# Altium PCB pcb.PcbDoc
Units mil, origin at the board's own origin, x right, y up, seen from the top; angles counter-clockwise.
Board outline 10079.12 x 10365.92 mil, 2 copper layers (Top Layer, Bottom Layer), stack 62.205 mil thick; 131 components, 60 nets, 394 pads, 54 vias.
Unrouted connection lines stored in the file: 29.
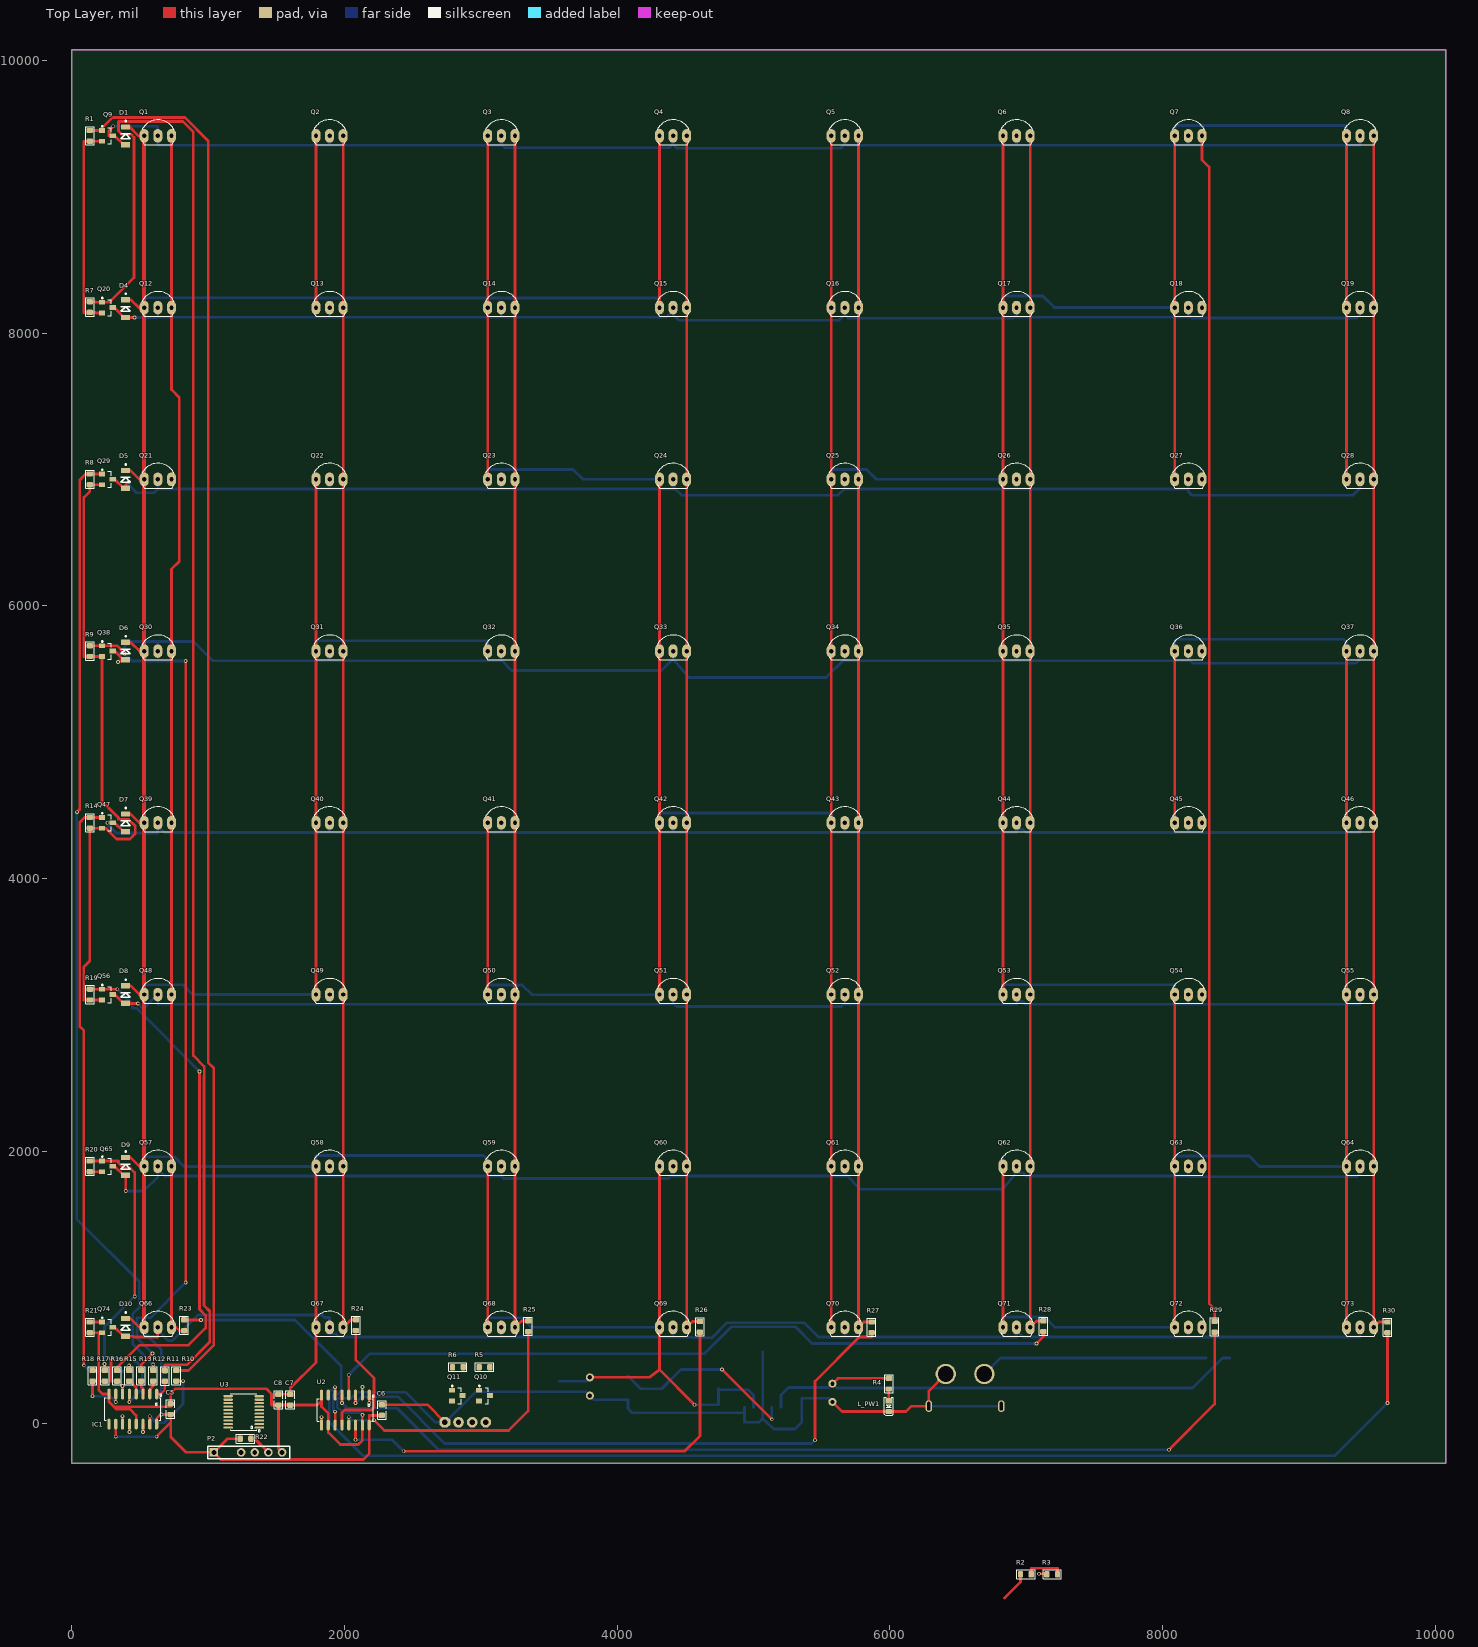
[diagram p0: Top Layer view]
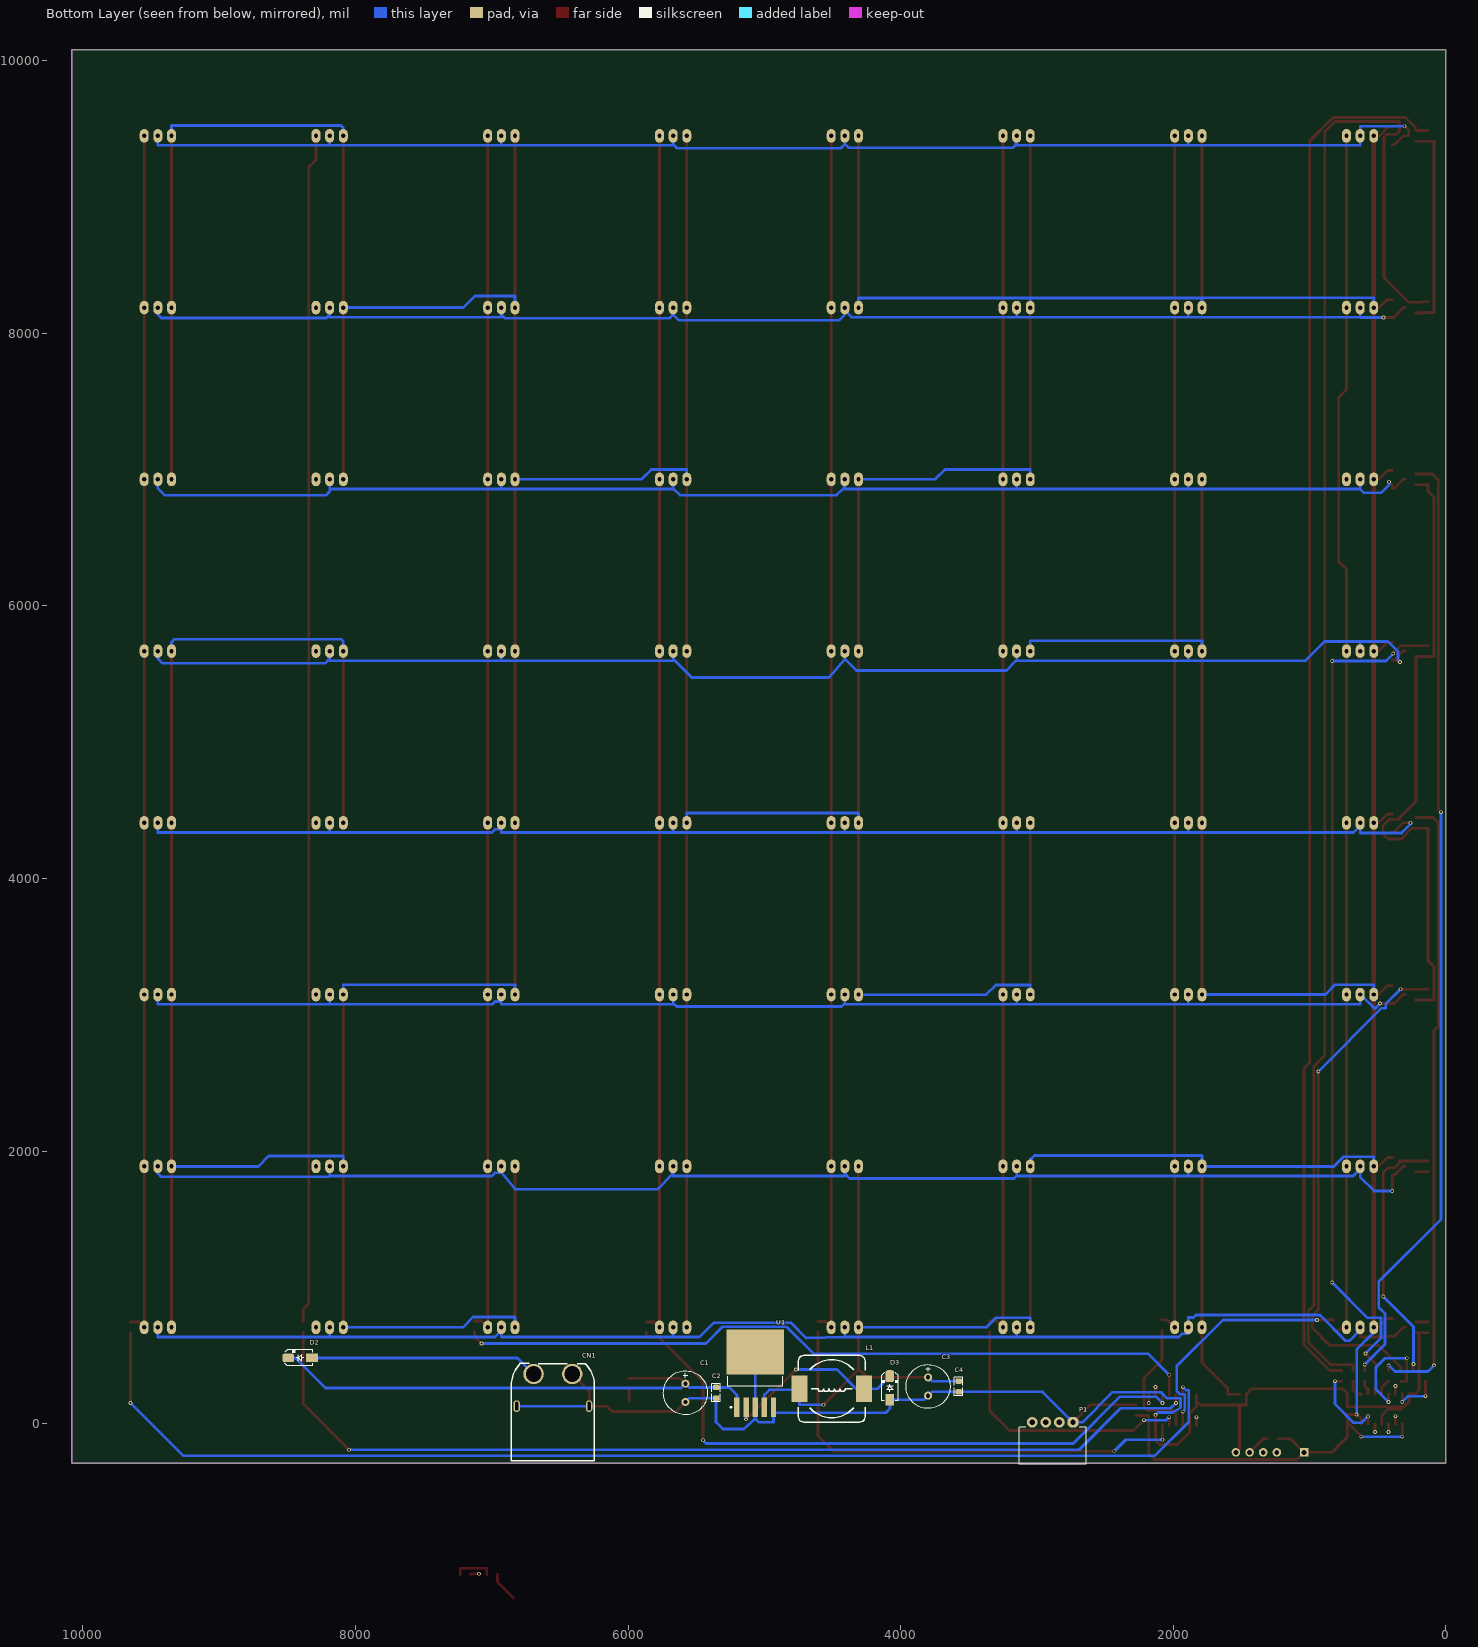
[diagram p1: Bottom Layer view, seen from below]

## Layer stack, top to bottom
Top Solder: solder mask 0.3937, Solder Resist, Dk 3.5
Top Layer: signal copper 1.378
Dielectric 1: dielectric 59.4488, FR-4, Dk 4.8
Bottom Layer: signal copper 1.378
Bottom Solder: solder mask 0.3937, Solder Resist, Dk 3.5

## Board outline
0,-287.18 0,10078.74 10079.11,10078.74 10079.12,-287.18

## Design rules (kind name [scope] priority, off if disabled: settings)
AssemblyTestPointUsage [All] p0: scope1count=1 scope1_0_kind=Board scope1_0_value=Board scope2count=1 scope2_0_kind=Board scope2_0_value=Board commentlength=0
AssemblyTestpoint [All] p0: scope1count=1 scope1_0_kind=Board scope1_0_value=Board scope2count=1 scope2_0_kind=Board scope2_0_value=Board commentlength=0
Clearance [All] p0: scope1count=1 scope1_0_kind=Board scope1_0_value=Board scope2count=1 scope2_0_kind=Board scope2_0_value=Board commentlength=0 gap=10
Clearance [All] p1: gap=10 ignorepadtopadclearanceinfootprint=TRUE except(30: THPad-Poly)
ComponentClearance [All] p0: scope1count=1 scope1_0_kind=Board scope1_0_value=Board scope2count=1 scope2_0_kind=Board scope2_0_value=Board commentlength=0 gap=10 collisioncheckmode=3
DiffPairsRouting [All] p0: scope1count=1 scope1_0_kind=Board scope1_0_value=Board scope2count=1 scope2_0_kind=Board scope2_0_value=Board commentlength=0
FabricationTestPointUsage [All] p0: scope1count=1 scope1_0_kind=Board scope1_0_value=Board scope2count=1 scope2_0_kind=Board scope2_0_value=Board commentlength=0 valid=0 allowmultiple=FALSE
FabricationTestpoint [All] p0: scope1count=1 scope1_0_kind=Board scope1_0_value=Board scope2count=1 scope2_0_kind=Board scope2_0_value=Board commentlength=0 side=3 testpointundercomponent=TRUE minsize=40 maxsize=100 preferedsize=60 minholesize=0 maxholesize=40 preferedholesize=32 testpointgrid=1
FanoutControl Fanout_BGA [All] p0 off: scope1count=1 scope1_0_kind=Board scope1_0_value=Board scope2count=1 scope2_0_kind=Board scope2_0_value=Board commentlength=69 // Protel DXP Scope 1 Expression Was: IsBGA   Fanout_BGA (Default Rule)
FanoutControl Fanout_LCC [All] p0 off: scope1count=1 scope1_0_kind=Board scope1_0_value=Board scope2count=1 scope2_0_kind=Board scope2_0_value=Board commentlength=69 // Protel DXP Scope 1 Expression Was: IsLCC   Fanout_LCC (Default Rule)
FanoutControl Fanout_SOIC [All] p0 off: scope1count=1 scope1_0_kind=Board scope1_0_value=Board scope2count=1 scope2_0_kind=Board scope2_0_value=Board commentlength=71 // Protel DXP Scope 1 Expression Was: IsSOIC   Fanout_SOIC (Default Rule)
FanoutControl Fanout_Small [All] p0 off: scope1count=1 scope1_0_kind=Board scope1_0_value=Board scope2count=1 scope2_0_kind=Board scope2_0_value=Board commentlength=84 // Protel DXP Scope 1 Expression Was: (CompPinCount < 5)   Fanout_Small (Default Rule)
FanoutControl Fanout_Default [All] p0: scope1count=1 scope1_0_kind=Board scope1_0_value=Board scope2count=1 scope2_0_kind=Board scope2_0_value=Board commentlength=30 // Fanout_Default (Default Rule)
Height [All] p0: scope1count=1 scope1_0_kind=Board scope1_0_value=Board scope2count=1 scope2_0_kind=Board scope2_0_value=Board commentlength=0
Height [All] p1: minheight=0 maxheight=1574.8 prefheight=500
HoleSize [All] p0: scope1count=1 scope1_0_kind=Board scope1_0_value=Board scope2count=1 scope2_0_kind=Board scope2_0_value=Board commentlength=0 absolutevalues=TRUE maxlimit=236.22 minlimit=3.94 maxpercent=80.000 minpercent=20.000
HoleSize [All] p1: absolutevalues=TRUE maxlimit=236.22 minlimit=3.94 maxpercent=80.000 minpercent=20.000
HoleToHoleClearance [All] p0: scope1count=1 scope1_0_kind=Board scope1_0_value=Board scope2count=1 scope2_0_kind=Board scope2_0_value=Board commentlength=0
LayerPairs [All] p0: scope1count=1 scope1_0_kind=Board scope1_0_value=Board scope2count=1 scope2_0_kind=Board scope2_0_value=Board commentlength=0 enforce=TRUE
MinimumSolderMaskSliver [All] p0: scope1count=1 scope1_0_kind=Board scope1_0_value=Board scope2count=1 scope2_0_kind=Board scope2_0_value=Board commentlength=0
MinimumSolderMaskSliver [All] p1: minsoldermaskwidth=1
NetAntennae [All] p0: scope1count=1 scope1_0_kind=Board scope1_0_value=Board scope2count=1 scope2_0_kind=Board scope2_0_value=Board commentlength=0
PasteMaskExpansion [All] p0: scope1count=1 scope1_0_kind=Board scope1_0_value=Board scope2count=1 scope2_0_kind=Board scope2_0_value=Board commentlength=0 expansion=0
PlaneClearance [All] p0: scope1count=1 scope1_0_kind=Board scope1_0_value=Board scope2count=1 scope2_0_kind=Board scope2_0_value=Board commentlength=0 clearance=20
PlaneConnect [All] p0: scope1count=1 scope1_0_kind=Board scope1_0_value=Board scope2count=1 scope2_0_kind=Board scope2_0_value=Board commentlength=0 planeconnectstyle=Relief reliefexpansion=20 reliefentries=4 reliefconductorwidth=35 reliefairgap=10
PlaneConnect [All] p1: planeconnectstyle=Relief reliefexpansion=20 reliefentries=4 reliefconductorwidth=35 reliefairgap=10
PolygonConnect [All] p0: scope1count=1 scope1_0_kind=Board scope1_0_value=Board scope2count=1 scope2_0_kind=Board scope2_0_value=Board commentlength=0 connectstyle=Relief reliefconductorwidth=25 reliefentries=4 polygonreliefangle="90 Angle"
PolygonConnect [All] p1: thpad.connectstyle=Relief thpad.reliefconductorwidth=25 thpad.reliefentries=4 thpad.polygonreliefangle="90 Angle" thpad.airgapwidth=30 smdpad.connectstyle=Relief smdpad.reliefconductorwidth=25 smdpad.reliefentries=4 smdpad.polygonreliefangle="90 Angle" smdpad.airgapwidth=15 via.connectstyle=Relief via.reliefconductorwidth=25 via.reliefentries=4 via.polygonreliefangle="90 Angle" via.airgapwidth=15
RoutingCorners [All] p0: scope1count=1 scope1_0_kind=Board scope1_0_value=Board scope2count=1 scope2_0_kind=Board scope2_0_value=Board commentlength=0 cornerstyle=45-Degree minsetback=100 maxsetback=100
RoutingLayers [All] p0: scope1count=1 scope1_0_kind=Board scope1_0_value=Board scope2count=1 scope2_0_kind=Board scope2_0_value=Board commentlength=0 top layer=Automatic bottom layer=Automatic
RoutingPriority [All] p0: scope1count=1 scope1_0_kind=Board scope1_0_value=Board scope2count=1 scope2_0_kind=Board scope2_0_value=Board commentlength=0
RoutingTopology [All] p0: scope1count=1 scope1_0_kind=Board scope1_0_value=Board scope2count=1 scope2_0_kind=Board scope2_0_value=Board commentlength=0 topology=Shortest
RoutingVias [All] p0: scope1count=1 scope1_0_kind=Board scope1_0_value=Board scope2count=1 scope2_0_kind=Board scope2_0_value=Board commentlength=0 holewidth=15.75 width=27.56 viastyle="Through Hole" minholewidth=11.81 minwidth=23.62 maxholewidth=39.37 maxwidth=98.43
RoutingVias [All] p1: holewidth=15.75 width=27.56 viastyle="Through Hole" minholewidth=11.81 minwidth=23.62 maxholewidth=39.37 maxwidth=98.43
ShortCircuit [All] p0: scope1count=1 scope1_0_kind=Board scope1_0_value=Board scope2count=1 scope2_0_kind=Board scope2_0_value=Board commentlength=0 allowed=FALSE
SilkToBoardRegionClearance [All] p0: scope1count=1 scope1_0_kind=Board scope1_0_value=Board scope2count=1 scope2_0_kind=Board scope2_0_value=Board commentlength=0
SilkToSilkClearance [All] p0: scope1count=1 scope1_0_kind=Board scope1_0_value=Board scope2count=1 scope2_0_kind=Board scope2_0_value=Board commentlength=0
SilkToSilkClearance [All] p1: silktosilkclearance=1
SilkToSolderMaskClearance [All] p0 off: scope1count=1 scope1_0_kind=Board scope1_0_value=Board scope2count=1 scope2_0_kind=Board scope2_0_value=Board commentlength=44 // Protel DXP Scope 1 Expression Was: IsPad
SilkToSolderMaskClearance [IsPad] p1: minsilkscreentomaskgap=0 clearancetoexposedcopper=TRUE
SolderMaskExpansion [All] p0: scope1count=1 scope1_0_kind=Board scope1_0_value=Board scope2count=1 scope2_0_kind=Board scope2_0_value=Board commentlength=0 expansion=4
SolderMaskExpansion [All] p1: expansion=4 istentingtop=FALSE
SupplyNets "Schematic Supply Nets_4" [All] p0: scope1count=1 scope1_0_kind=Net scope1_0_value=+5 scope2count=1 scope2_0_kind=Board scope2_0_value=Board commentlength=0 voltage=0.000
SupplyNets "Schematic Supply Nets_3" [All] p0: scope1count=1 scope1_0_kind=Net scope1_0_value=GND scope2count=1 scope2_0_kind=Board scope2_0_value=Board commentlength=0 voltage=0.000
SupplyNets "Schematic Supply Nets_2" [All] p0: scope1count=1 scope1_0_kind=Net scope1_0_value=+24 scope2count=1 scope2_0_kind=Board scope2_0_value=Board commentlength=0 voltage=0.000
SupplyNets "Schematic Supply Nets_1" [All] p0: scope1count=1 scope1_0_kind=Net scope1_0_value=+3V3 scope2count=1 scope2_0_kind=Board scope2_0_value=Board commentlength=0 voltage=0.000
SupplyNets "Schematic Supply Nets" [All] p0: scope1count=1 scope1_0_kind=Net scope1_0_value=+24IN scope2count=1 scope2_0_kind=Board scope2_0_value=Board commentlength=0 voltage=0.000
SupplyNets "Schematic Supply Nets_4" [InNet('+5')] p1: voltage=0.000
SupplyNets "Schematic Supply Nets_3" [InNet('GND')] p2: voltage=0.000
SupplyNets "Schematic Supply Nets_2" [InNet('+24')] p3: voltage=0.000
SupplyNets "Schematic Supply Nets_1" [InNet('+3V3')] p4: voltage=0.000
SupplyNets "Schematic Supply Nets" [InNet('+24IN')] p5: voltage=0.000
UnRoutedNet [All] p0: scope1count=1 scope1_0_kind=Board scope1_0_value=Board scope2count=1 scope2_0_kind=Board scope2_0_value=Board commentlength=0
UnRoutedNet [All] p1: checkbadconnections=TRUE
UnpouredPolygon [All] p0: scope1count=1 scope1_0_kind=Board scope1_0_value=Board scope2count=1 scope2_0_kind=Board scope2_0_value=Board commentlength=0
Width [All] p0: scope1count=1 scope1_0_kind=Board scope1_0_value=Board scope2count=1 scope2_0_kind=Board scope2_0_value=Board commentlength=0 maxlimit=100 minlimit=10 preferedwidth=20
Width [All] p1: maxlimit=100 minlimit=10 preferedwidth=20
23 further rules are at their usual default settings.

## Components (designator, comment, footprint, x,y, rotation, side; value= is the part's Value field where it differs from the comment)
C1 "470uF/35V" C8X12mm 5578.82,228.56 r270 bottom
C2 "104" C_0805_SMD 5354.33,228.57 r90 bottom
C3 "220uF/35V" C8X12mm 3799.21,274.76 r270 bottom
C4 "104" C_0805_SMD 3574.8,274.76 r90 bottom
C5 "104" C_0805_SMD 723.75,109.07 r270 top
C6 "104" C_0805_SMD 2273.09,101.88 r270 top
C7 "10uF/25V" C_0805_SMD 1601.18,177.63 r270 top
C8 "104" C_0805_SMD 1514.57,177.63 r270 top
CN1 "XT60PW-M" CONN-TH_XT60PW-M 6551.18,86.83 r90 bottom
D1 "LL4148" SOD80C_MFG 394.13,9448.82 r270 top
D2 "SS34" D_SMA#1 8405.51,484.25 r0 bottom
D3 "SS34" D_SMA#2 4078.74,264 r90 bottom
D4 "LL4148" SOD80C_MFG 394.13,8181.1 r270 top
D5 "LL4148" SOD80C_MFG 394.13,6929.13 r270 top
D6 "LL4148" SOD80C_MFG 394.13,5669.29 r270 top
D7 "LL4148" SOD80C_MFG 394.13,4409.45 r270 top
D8 "LL4148" SOD80C_MFG 394.13,3149.61 r270 top
D9 "LL4148" SOD80C_MFG 394.13,1889.76 r270 top
D10 "LL4148" SOD80C_MFG 394.13,708.66 r270 top
IC1 "74HC595" SO_16 446.3,109.07 r270 top
L1 "68uH" CDRH127 4505.8,258.09 r0 bottom
L_PW1 "LED RED" "LED 0805 Red" 5991.81,130.14 r270 top
P1 "XH2.54 4P" XH2.54_4P_RA 2885.83,12.03 r0 bottom
P2 "Nuvoton" "Header Code Nuvoton 2.54 6P" 1290.89,-208.66 r0 top
Q1 "A3144" QTO-92 629.92,9448.82 r0 top locked
Q2 "A3144" QTO-92 1889.76,9448.82 r0 top locked
Q3 "A3144" QTO-92 3149.61,9448.82 r0 top locked
Q4 "A3144" QTO-92 4409.45,9448.82 r0 top locked
Q5 "A3144" QTO-92 5669.29,9448.82 r0 top locked
Q6 "A3144" QTO-92 6929.13,9448.82 r0 top locked
Q7 "A3144" QTO-92 8188.98,9448.82 r0 top locked
Q8 "A3144" QTO-92 9448.82,9448.82 r0 top locked
Q9 "S8050" "SOT23_N NXP" 260.28,9448.82 r0 top
Q10 "BSS138L" "SOT23_N NXP" 3026.27,207.83 r0 top
Q11 "BSS138L" "SOT23_N NXP" 2826.77,207.83 r0 top
Q12 "A3144" QTO-92 629.92,8188.98 r0 top locked
Q13 "A3144" QTO-92 1889.76,8188.98 r0 top locked
Q14 "A3144" QTO-92 3149.61,8188.98 r0 top locked
Q15 "A3144" QTO-92 4409.45,8188.98 r0 top locked
Q16 "A3144" QTO-92 5669.29,8188.98 r0 top locked
Q17 "A3144" QTO-92 6929.13,8188.98 r0 top locked
Q18 "A3144" QTO-92 8188.98,8188.98 r0 top locked
Q19 "A3144" QTO-92 9448.82,8188.98 r0 top locked
Q20 "S8050" "SOT23_N NXP" 260.28,8188.98 r0 top
Q21 "A3144" QTO-92 629.92,6929.13 r0 top locked
Q22 "A3144" QTO-92 1889.76,6929.13 r0 top locked
Q23 "A3144" QTO-92 3149.61,6929.13 r0 top locked
Q24 "A3144" QTO-92 4409.45,6929.13 r0 top locked
Q25 "A3144" QTO-92 5669.29,6929.13 r0 top locked
Q26 "A3144" QTO-92 6929.13,6929.13 r0 top locked
Q27 "A3144" QTO-92 8188.98,6929.13 r0 top locked
Q28 "A3144" QTO-92 9448.82,6929.13 r0 top locked
Q29 "S8050" "SOT23_N NXP" 260.28,6929.13 r0 top
Q30 "A3144" QTO-92 629.92,5669.29 r0 top locked
Q31 "A3144" QTO-92 1889.76,5669.29 r0 top locked
Q32 "A3144" QTO-92 3149.61,5669.29 r0 top locked
Q33 "A3144" QTO-92 4409.45,5669.29 r0 top locked
Q34 "A3144" QTO-92 5669.29,5669.29 r0 top locked
Q35 "A3144" QTO-92 6929.13,5669.29 r0 top locked
Q36 "A3144" QTO-92 8188.98,5669.29 r0 top locked
Q37 "A3144" QTO-92 9448.82,5669.29 r0 top locked
Q38 "S8050" "SOT23_N NXP" 260.28,5669.29 r0 top
Q39 "A3144" QTO-92 629.92,4409.45 r0 top locked
Q40 "A3144" QTO-92 1889.76,4409.45 r0 top locked
Q41 "A3144" QTO-92 3149.61,4409.45 r0 top locked
Q42 "A3144" QTO-92 4409.45,4409.45 r0 top locked
Q43 "A3144" QTO-92 5669.29,4409.45 r0 top locked
Q44 "A3144" QTO-92 6929.13,4409.45 r0 top locked
Q45 "A3144" QTO-92 8188.98,4409.45 r0 top locked
Q46 "A3144" QTO-92 9448.82,4409.45 r0 top locked
Q47 "S8050" "SOT23_N NXP" 260.28,4409.45 r0 top
Q48 "A3144" QTO-92 629.92,3149.61 r0 top locked
Q49 "A3144" QTO-92 1889.76,3149.61 r0 top locked
Q50 "A3144" QTO-92 3149.61,3149.61 r0 top locked
Q51 "A3144" QTO-92 4409.45,3149.61 r0 top locked
Q52 "A3144" QTO-92 5669.29,3149.61 r0 top locked
Q53 "A3144" QTO-92 6929.13,3149.61 r0 top locked
Q54 "A3144" QTO-92 8188.98,3149.61 r0 top locked
Q55 "A3144" QTO-92 9448.82,3149.61 r0 top locked
Q56 "S8050" "SOT23_N NXP" 260.28,3149.61 r0 top
Q57 "A3144" QTO-92 629.92,1889.76 r0 top locked
Q58 "A3144" QTO-92 1889.76,1889.76 r0 top locked
Q59 "A3144" QTO-92 3149.61,1889.76 r0 top locked
Q60 "A3144" QTO-92 4409.45,1889.76 r0 top locked
Q61 "A3144" QTO-92 5669.29,1889.76 r0 top locked
Q62 "A3144" QTO-92 6929.13,1889.76 r0 top locked
Q63 "A3144" QTO-92 8188.98,1889.76 r0 top locked
Q64 "A3144" QTO-92 9448.82,1889.76 r0 top locked
Q65 "S8050" "SOT23_N NXP" 260.28,1889.76 r0 top
Q66 "A3144" QTO-92 629.92,708.66 r0 top locked
Q67 "A3144" QTO-92 1889.76,708.66 r0 top locked
Q68 "A3144" QTO-92 3149.61,708.66 r0 top locked
Q69 "A3144" QTO-92 4409.45,708.66 r0 top locked
Q70 "A3144" QTO-92 5669.29,708.66 r0 top locked
Q71 "A3144" QTO-92 6929.13,708.66 r0 top locked
Q72 "A3144" QTO-92 8188.98,708.66 r0 top locked
Q73 "A3144" QTO-92 9448.82,708.66 r0 top locked
Q74 "S8050" "SOT23_N NXP" 260.28,708.66 r0 top
R1 "1k" RES-SMD-0805 131.38,9448.82 r270 top
R2 "10K" RES-SMD-0805 6997.56,-1102.88 r0 top
R3 "10K" RES-SMD-0805 7190.47,-1102.88 r0 top
R4 "10K" RES-SMD-0805 5992.13,295.49 r270 top
R5 "10K" RES-SMD-0805 3026.27,416.49 r180 top
R6 "10K" RES-SMD-0805 2830.71,416.8 r0 top
R7 "1k" RES-SMD-0805 131.38,8192.91 r270 top
R8 "1k" RES-SMD-0805 131.38,6929.13 r270 top
R9 "1k" RES-SMD-0805 131.38,5669.29 r270 top
R10 "1k" RES-SMD-0805 765.2,353.16 r270 top
R11 "1k" RES-SMD-0805 681.34,352.11 r270 top
R12 "1k" RES-SMD-0805 595.91,353.16 r270 top
R13 "1k" RES-SMD-0805 507.72,353.16 r270 top
R14 "1k" RES-SMD-0805 131.38,4409.45 r270 top
R15 "1k" RES-SMD-0805 419.53,353.16 r270 top
R16 "1k" RES-SMD-0805 331.34,353.16 r270 top
R17 "1k" RES-SMD-0805 241.57,353.16 r270 top
R18 "1k" RES-SMD-0805 151.02,353.16 r270 top
R19 "1k" RES-SMD-0805 131.38,3149.61 r270 top
R20 "1k" RES-SMD-0805 131.38,1889.76 r270 top
R21 "1k" RES-SMD-0805 131.38,708.66 r270 top
R22 "10K" RES-SMD-0805 1273.49,-108.45 r0 top
R23 "1k" RES-SMD-0805 822.83,723.66 r270 top
R24 "1k" RES-SMD-0805 2082.68,724.41 r90 top
R25 "1k" RES-SMD-0805 3346.46,716.54 r90 top
R26 "1k" RES-SMD-0805 4606.3,712.5 r90 top
R27 "1k" RES-SMD-0805 5866.14,708.66 r90 top
R28 "1k" RES-SMD-0805 7125.98,716.54 r90 top
R29 "1k" RES-SMD-0805 8381.89,712.6 r90 top
R30 "1k" RES-SMD-0805 9649.61,708.66 r90 top
U1 "LM2596HVS-5.0" TO-263-5 5066.93,325.02 r180 bottom
U2 "74HC165" SO_16 2005.44,101.88 r270 top
U3 "MS51FB9AE" SOG65_20 1259.84,88.4 r180 top

## Footprints (in the part's own frame and the unit in brackets; to place one, negate y for a bottom-side part, rotate by r counter-clockwise, add the part's x,y. Pads: shape width x height; smd on the part's side, far side on the other; paste and mask are expansions set on the pad)
C8X12mm [mm] "Cap Elec, D8.0X12.0H pitch: 3.5mm, RB.14/.26, RB.15/.32"
  round 1.5 hole 0.8: 1(-1.7,0) 2(1.7,0)
  silkscreen extent -4.1,-4.1 4.1,4.1
C_0805_SMD [mm]
  rrect50% 1x1.2 smd: 1(-1,0) 2(1,0)
  silkscreen extent -1.7,-0.8 1.7,0.8
CDRH127 [mm] "12*12*8mm"
  rect 3x5 smd: 1(-6,0) 2(6,0)
  silkscreen extent -6.2,-6.2 6.2,6.2
CONN-TH_XT60PW-M [mm]
  round 3.8 hole 2.9 paste+0 mask+0.05: 1(7.1,-3.6) 2(7.1,3.6)
  oval 2.2x1.2 hole 0.6 slot 1.6 at 0 deg paste+0 mask+0.05: 3(1.1,6.75) 4(1.1,-6.75)
  silkscreen extent -9.07,-7.75 9.07,7.75
D_SMA#1 [mm] "SMA Molded Diode, 2-Leads, Body 4.3x2.7mm, SOD-128"
  rect 2.2x1.6 smd: 1(-2.2,0)
  rrect50% 2.2x1.6 smd: 2(2.2,0)
  Bottom 3D Body keep-out region: 0.9,1.5 1.5,1.5 1.5,0.94 0.9,0.94
  silkscreen extent -2.4,-1.5 2.88,1.5
D_SMA#2 [mm] "SMA Molded Diode, 2-Leads, Body 4.3x2.7mm, SOD-128"
  rect 2.2x1.6 smd: 1(-2.2,0)
  rrect50% 2.2x1.6 smd: 2(2.2,0)
  silkscreen extent -2.4,-1.5 2.87,1.5
"Header Code Nuvoton 2.54 6P" [mm]
  rect 1.6x1.6 hole 0.9: 1(-6.35,0)
  round 1.6 on Top Overlay: 2(-3.81,0)
  round 1.6 hole 0.9: 3(-1.27,0) 4(1.27,0) 5(3.81,0) 6(6.35,0)
  silkscreen extent -7.49,-1.14 7.75,1.14
"LED 0805 Red" [mm]
  rect 1x1.2 smd: 1(-1,0)
  rrect50% 1x1.2 smd: 2(1,0)
  silkscreen extent -1.7,-0.8 1.7,0.8
QTO-92 [mil] "TO-92"
  oval 66x100 hole 32: 1(-100,0) 2(0,0) 3(100,0)
  silkscreen extent -117,-65 120,118
RES-SMD-0805 [mm]
  rrect50% 1x1.2 smd paste-0.1 mask+0.075: 1(-1,0) 2(1,0)
  silkscreen extent -1.7,-0.8 1.7,0.8
SO_16 [mm] "SOP, SOIC, 3.9mm width, 1.27mm pitch,"
  oval 2x0.6 smd: 1(-2.8,4.445) 2(-2.8,3.175) 3(-2.8,1.905) 4(-2.8,0.635) 5(-2.8,-0.635) 6(-2.8,-1.905) 7(-2.8,-3.175) 8(-2.8,-4.445) 9(2.8,-4.445) 10(2.8,-3.175) 11(2.8,-1.905) 12(2.8,-0.635) 13(2.8,0.635) 14(2.8,1.905) 15(2.8,3.175) 16(2.8,4.445)
  silkscreen extent -2.8,-5.2 2.1,5.4
SOD80C_MFG [mm]
  rect 1x1.7 smd: 1(-1.65,0) 2(1.65,0)
  silkscreen extent -2.9,-0.89 0.51,0.89
SOG65_20 [mm] "PW TSSOP (TI), MO-153-AC (JEDEC), 20Lead, pitch: 0.65mm, 6.5x4.4x1.2mm"
  oval 1.8x0.4 smd mask+0.075: 1(-2.9,2.925) 2(-2.9,2.275) 3(-2.9,1.625) 4(-2.9,0.975) 5(-2.9,0.325) 6(-2.9,-0.325) 7(-2.9,-0.975) 8(-2.9,-1.625) 9(-2.9,-2.275) 10(-2.9,-2.925) 11(2.9,-2.925) 12(2.9,-2.275) 13(2.9,-1.625) 14(2.9,-0.975) 15(2.9,-0.325) 16(2.9,0.325) 17(2.9,0.975) 18(2.9,1.625) 19(2.9,2.275) 20(2.9,2.925)
  silkscreen extent -3.1,-3.4 2.4,3.73
"SOT23_N NXP" [mil] "SOT23, 3-Leads, Body 3x1.4mm, Pitch 0.95mm, IPC Medium Density"
  rect 45x35 smd: 1(-39.37,39.37) 2(-39.37,-39.37) 3(39.37,0)
  silkscreen extent -42,-59 28,76
TO-263-5 [mil]
  rect 40x140 smd paste+0 mask+0: 1(-134.02,-202.85) 2(-67.01,-202.85) 3(0,-202.85) 4(67.01,-202.85) 5(134.02,-202.85)
  rect 419.69x329.92 smd paste+0 mask+0: 3(0,202.85)
  silkscreen extent -201,-208 201,23
XH2.54_4P_RA [mm]
  oct 2x2 hole 1: 1(-3.81,0)
  round 2 hole 1: 2(-1.27,0) 3(1.27,0) 4(3.81,0)
  silkscreen extent -6.25,0.9 6.25,7.8

## Part data
C1: library part "Cap Pol 470uF/35V", "Polarized Capacitor (Axial) 470uF 35V"
C2 C4 C5 C6 C8: library part "Cap 0805 104 100nF", "Cap SMD 0805 104-100nF-0.1uF 50V"
C3: library part "Cap Pol 220uF/35V", "Polarized Capacitor (Axial) 220uF 35V"
C7: library part "Cap 0805 10uF 25V", "Cap SMD 0805 10uF"
D1 D4 D5 D6 D7 D8 D9 D10: "0.2A, 100V, SOD80"
D2 D3: library part SS34-SMA, "Surface-Mount Schottky Barrier Rectifier"
IC1: library part "74HC595 SMD SO16", "Shift Register Single 8-Bit Serial to Serial/Parallel 16-Pin SOIC T/R"
L1: library part "IND CDRH127 1280-680 68uH", "CDRH127 Cu?n C?m Dán SMD 1280-680 68uH 3.2A"
L_PW1: library part "LED 0805 RED", "LED 0805 SMD RED"
P1: library part XH2.54_4P_RA, "XH2.54 RA"
P2: library part "Header Code Nuvoton", "Header 6-5Pin"
Q1 Q2 Q3 Q4 Q5 Q6 Q7 Q8 Q12 Q13 Q14 Q15 Q16 Q17 Q18 Q19 Q21 Q22 Q23 Q24 Q25 Q26 Q27 Q28 Q30 Q31 Q32 Q33 Q34 Q35 Q36 Q37 Q39 Q40 Q41 Q42 Q43 Q44 Q45 Q46 Q48 Q49 Q50 Q51 Q52 Q53 Q54 Q55 Q57 Q58 Q59 Q60 Q61 Q62 Q63 Q64 Q66 Q67 Q68 Q69 Q70 Q71 Q72 Q73: library part "hall sensor A3144", "Sensitive Hall Effect Switches for High-Temperature Operation 4.5-24V"
Q9 Q20 Q29 Q38 Q47 Q56 Q65 Q74: library part "S8050 SOT-23", "J3Y-NPN SMD Transistor SOT23"
Q10 Q11: library part "BSS138L SOT23", "Power MOSFET 200 mA, 50V, N-Channel SOT23"
R1 R7 R8 R9 R10 R11 R12 R13 R14 R15 R16 R17 R18 R19 R20 R21 R23 R24 R25 R26 R27 R28 R29 R30: library part "Res 1k 0805", "Resistor SMD 0805"
R2 R3 R4 R5 R6 R22: library part "Res 10k 0805", "Resistor SMD 0805"
U1: "Vin 4.5-40VDC, Vout 5VDC, Iout MAX 3A"
U2: library part 74HC165-SOIC-16, "IC Shift Register 1 Element 8 Bit, Complementary 16-SOIC"
U3: "MS51FB9AE, ROM 16KB, RAM 256B + 1KB, SPROM 128B, 1T 8051-based CMOS up to 24Mhz"

## Via types
v1: diameter 27.56, hole 15.75, Top Layer to Bottom Layer, 54 vias

## Nets (pads, with @x,y where several pads share a name; then routed paths per layer and width w, separated by ;. In a path a pad name is that pad's centre, name@x,y a point inside that pad or via, vN(x,y) a via of type N, cw(c..) or ccw(c..) an arc to the next point about the centre after c; other vN are vias at no path point)
+3V3: P1.4 Q10.1 Q11.1 R5.2 R6.2
+5: C3.1 C4.2 C5.2 C6.2 C7.1 C8.1 D1.1 D4.1 D5.1 D6.1 D7.1 D8.1 D9.1 D10.1 IC1.10 IC1.16 L1.2 P2.1 Q1.1 Q2.1 Q3.1 Q4.1 Q5.1 Q6.1 Q7.1 Q8.1 Q12.1 Q13.1 Q14.1 Q15.1 Q16.1 Q17.1 Q18.1 Q19.1 Q21.1 Q22.1 Q23.1 Q24.1 Q25.1 Q26.1 Q27.1 Q28.1 Q30.1 Q31.1 Q32.1 Q33.1 Q34.1 Q35.1 Q36.1 Q37.1 Q39.1 Q40.1 Q41.1 Q42.1 Q43.1 Q44.1 Q45.1 Q46.1 Q48.1 Q49.1 Q50.1 Q51.1 Q52.1 Q53.1 Q54.1 Q55.1 Q57.1 Q58.1 Q59.1 Q60.1 Q61.1 Q62.1 Q63.1 Q64.1 Q66.1 Q67.1 Q68.1 Q69.1 Q70.1 Q71.1 Q72.1 Q73.1 R2.2 R3.2 R22.1 U1.4 U2.16 U3.9 | length 88872.7
  Top Layer w20: v1(321.3,-93.18) IC1.10 ; D10.1 429.19,773.62 494.15,708.66 Q66.1 ; D9.1 429.19,1954.72 494.15,1889.76 Q57.1 ; D8.1 429.19,3214.57 494.15,3149.61 Q48.1 ; D7.1 429.19,4474.41 494.15,4409.45 Q39.1 ; D6.1 429.19,5734.25 494.15,5669.29 Q30.1 ; D5.1 429.19,6994.09 494.15,6929.13 Q21.1 ; D4.1 433.19,8246.06 490.27,8188.98 Q12.1 ; D1.1 423.94,9513.78 488.9,9448.82 Q1.1 ; v1(621.19,-93.18) 723.75,9.38 ; IC1.16 621.3,40.81 650.19,69.7 v1(655.19,69.7) C5.2 723.75,9.38 ; R22.1 1141.1,-108.45 P2.1 ; C8.1 C7.1 1601.18,262.82 1789.76,451.4 Q67.1 Q58.1 ; Q49.1 Q40.1 Q31.1 Q22.1 ; Q13.1 Q2.1 ; C6.2 2180.44,62.51 U2.16 2180.44,-219.18 2139.44,-260.18 1092.41,-260.18 P2.1 ; Q68.1 Q59.1 ; Q50.1 Q41.1 ; Q23.1 Q14.1 Q3.1 ; C3.1 4235.31,341.68 4309.45,397.82 ; Q60.1 Q69.1 4309.45,397.82 ; Q51.1 Q42.1 Q33.1 Q24.1 ; Q15.1 Q4.1 ; v1(4566.45,140.82) 4309.45,397.82 ; Q70.1 Q61.1 Q52.1 Q43.1 Q34.1 Q25.1 Q16.1 Q5.1 ; Q71.1 Q62.1 ; Q53.1 Q44.1 Q35.1 Q26.1 Q17.1 Q6.1 ; R2.2 7036.93,-1059.18 7229.84,-1059.18 R3.2 ; Q72.1 Q63.1 Q54.1 ; Q45.1 Q36.1 ; Q27.1 Q18.1 Q7.1 ; Q73.1 Q64.1 Q55.1 Q46.1 Q37.1 ; Q28.1 Q19.1 Q8.1 ; 723.75,9.38 723.75,-94.23 838.19,-208.66 P2.1
  Top Layer w30: Q66.1 Q57.1 Q48.1 Q39.1 Q30.1 Q21.1 Q12.1 Q1.1
  Bottom Layer w20: v1(321.3,-93.18) v1(621.19,-93.18) ; Q66.1 529.92,672.09 655.19,546.82 v1(655.19,69.7) ; Q57.1 529.92,1959.82 752.19,1959.82 823.19,1888.82 1789.76,1888.82 Q58.1 1789.76,1968.82 3018.61,1968.82 3049.61,1937.82 Q59.1 ; Q48.1 529.92,3221.82 813.19,3221.82 885.19,3149.82 1789.76,3149.82 Q49.1 ; Q12.1 529.92,8261.82 1789.76,8261.82 1789.76,8259.82 ; Q31.1 1789.76,5744.82 3049.61,5744.82 Q32.1 ; Q13.1 1789.76,8259.82 ; Q68.1 3049.61,778.82 3302.19,778.82 3372.19,708.82 4309.45,708.82 Q69.1 ; Q50.1 3049.61,3219.82 3302.19,3219.82 3373.19,3148.82 4309.45,3148.82 Q51.1 ; Q23.1 3049.61,7001.82 3676.19,7001.82 3748.19,6929.82 4309.45,6929.82 Q24.1 ; Q14.1 3049.61,8259.82 ; C4.2 3771.65,314.12 C3.1 ; Q42.1 4309.45,4481.82 5569.29,4481.82 Q43.1 ; Q15.1 4309.45,8259.82 3049.61,8259.82 ; v1(4566.45,140.82) 4742.02,140.82 L1.2@4742.02,249.82 ; L1.2 L1.2@4742.02,249.82 ; U1.4 4999.92,212.82 4962.92,249.82 L1.2@4742.02,249.82 ; Q25.1 5569.29,7001.82 5829.19,7001.82 5901.19,6929.82 6829.13,6929.82 Q26.1 ; Q71.1 6829.13,783.82 7136.19,783.82 7211.19,708.82 8088.98,708.82 Q72.1 ; Q53.1 6829.13,3221.82 8088.98,3221.82 Q54.1 ; Q17.1 6829.13,8273.82 7121.19,8273.82 7206.19,8188.82 8088.98,8188.82 Q18.1 ; Q63.1 8088.98,1964.82 8636.19,1964.82 8712.19,1888.82 9348.82,1888.82 Q64.1 ; Q36.1 8088.98,5738.82 8106.98,5756.82 9325.82,5756.82 9348.82,5733.82 Q37.1 ; Q7.1 8088.98,9507.82 8104.98,9523.82 9348.82,9523.82 Q8.1 ; 1789.76,8259.82 3049.61,8259.82
+24: C1.1 C2.2 D2.2 R4.1 U1.1 | length 3950.1
  Top Layer w20: C1.1 5618.19,334.86 R4.1
  Bottom Layer w20: U1.1 5200.94,212.82 5256.06,267.93 C2.2 5551.26,267.93 C1.1 5610.5,263.82 8219.75,263.82 8440.19,484.25 D2.2
+24IN: CN1.2 D2.1 | length 1674.8
  Bottom Layer w20: CN1.2 6810.79,484.25 D2.1
CLK_I: U2.2 U3.12 | length 58.1
  Top Layer w20: U2.2 v1(2130.44,270.27)
CLK_O: IC1.11 U3.15 | length 58.1
  Top Layer w20: IC1.11 v1(371.3,56.98)
D0: Q1.3 Q12.3 Q30.3 Q39.3 Q48.3 Q57.3 Q66.3 R23.2 | length 8890.6
  Top Layer w20: Q1.3 Q12.3 729.92,7587.09 787.19,7529.82 787.19,6327.09 729.92,6269.82 Q30.3 Q39.3 Q48.3 Q57.3 Q66.3 764.19,708.66 788.56,684.29 R23.2
D1: Q2.3 Q13.3 Q22.3 Q31.3 Q40.3 Q49.3 Q58.3 Q67.3 R24.2 | length 8855.9
  Top Layer w20: Q2.3 Q13.3 Q22.3 Q31.3 Q40.3 Q49.3 Q58.3 Q67.3 2044.89,763.78 R24.2
D2: Q3.3 Q14.3 Q23.3 Q32.3 Q41.3 Q50.3 Q59.3 Q68.3 R25.2 | length 8856.6
  Top Layer w20: Q3.3 Q14.3 Q23.3 Q32.3 Q41.3 Q50.3 Q59.3 Q68.3 3296.85,755.91 R25.2
D3: Q4.3 Q15.3 Q24.3 Q33.3 Q42.3 Q51.3 Q60.3 Q69.3 R26.2 | length 8854.9
  Top Layer w20: Q4.3 Q15.3 Q24.3 Q33.3 Q42.3 Q51.3 Q60.3 Q69.3 4552.66,751.87 R26.2
D4: Q5.3 Q16.3 Q25.3 Q34.3 Q43.3 Q52.3 Q61.3 Q70.3 R27.2 | length 8853.3
  Top Layer w20: Q5.3 Q16.3 Q25.3 Q34.3 Q43.3 Q52.3 Q61.3 Q70.3 5808.66,748.03 R27.2
D5: Q6.3 Q17.3 Q26.3 Q35.3 Q44.3 Q53.3 Q62.3 Q71.3 R28.2 | length 8856.6
  Top Layer w20: Q6.3 Q17.3 Q26.3 Q35.3 Q44.3 Q53.3 Q62.3 Q71.3 7076.38,755.91 R28.2
D6: Q7.3 R29.2 | length 8735.3
  Top Layer w20: Q7.3 8288.98,9272.82 8342.19,9219.61 8342.19,883.82 8381.89,844.12 R29.2
D7: Q8.3 Q19.3 Q28.3 Q37.3 Q46.3 Q55.3 Q64.3 Q73.3 R30.2 | length 8857.3
  Top Layer w20: Q8.3 Q19.3 Q28.3 Q37.3 Q46.3 Q55.3 Q64.3 Q73.3 9588.19,748.03 R30.2
DAT_I: U2.9 U3.11 | length 58.1
  Top Layer w20: U2.9 v1(1830.44,49.8)
DAT_O: IC1.14 U3.14 | length 58.1
  Top Layer w20: v1(521.3,-59.32) IC1.14
GND: C1.2 C2.1 C3.2 C4.1 C5.1 C6.1 C7.2 C8.2 CN1.1 CN1.3 CN1.4 D3.1 IC1.8 IC1.13 L_PW1.2 P1.1 P2.6 Q9.2 Q20.2 Q29.2 Q38.2 Q47.2 Q56.2 Q65.2 Q74.2 R1.2 R7.2 R8.2 R9.2 R14.2 R19.2 R20.2 R21.2 U1.3 U1.5 U2.8 U2.10 U2.15 U3.7 | length 17427.8
  Top Layer w20: R21.2 175.19,669.29 197.19,669.29 ; R20.2 175.19,1850.39 Q65.2 ; Q74.2 197.19,669.29 ; Q56.2 175.19,3110.24 R19.2 87.19,3110.23 87.19,3353.82 131.19,3397.82 131.19,4370.07 R14.2 175.19,4370.07 Q47.2 247.93,4370.08 327.19,4290.82 425.19,4290.82 464.19,4329.82 464.19,4386.82 416.28,4434.72 341.19,4434.72 341.19,4446.82 220.19,4567.82 Q38.2@220.19,5629.92 ; Q38.2 Q38.2@220.19,5629.92 ; Q29.2 175.19,6889.76 R8.2 131.38,6840.82 87.19,6796.63 87.19,5629.92 R9.2 175.19,5629.92 Q38.2@220.19,5629.92 ; Q20.2 177.12,8149.61 173.19,8153.54 R7.2 87.19,8153.54 87.19,9409.44 R1.2 175.19,9409.44 Q9.2 ; IC1.8 IC1.8@271.3,218.82 ; IC1.13 471.3,62.82 425.3,108.82 325.19,108.82 271.3,162.71 271.3,162.82 ; P2.6 1514.57,-182.34 C8.2 ; U2.8 1830.44,168.51 ; v1(2130.44,66.82) U2.15 2130.44,-120.03 2100.19,-150.28 1968.54,-150.28 1880.44,-62.18 U2.10 1880.44,76.82 1830.44,126.82 1830.44,168.51 ; C6.1 2606.6,141.25 P1.1 ; C1.2 5649.69,90.77 L_PW1.2 6118.19,90.77 6157.57,130.15 CN1.4 6285.43,242.35 CN1.1 ; 197.19,669.29 197.19,246.82 225.19,218.82 IC1.8@271.3,218.82 ; 271.3,162.82 IC1.8@271.3,218.82 ; 271.3,162.82 307.3,126.82 723.75,126.82 C5.1 723.75,221.82 760.75,258.82 1425.19,258.82 1464.19,219.82 1464.19,138.25 C8.2 ; C8.2 C7.2 1800.19,138.25 1830.44,168.51
  Bottom Layer w20: v1(2130.44,66.82) 2113.44,83.82 2005.19,83.82 1946.66,120.04 1946.66,187.6 2047.19,187.6 2092.41,232.82 2445.19,232.82 2665.98,12.03 P1.1 2959.18,235.38 C4.1 3771.65,235.38 C3.2 3829.65,177.38 D3.1 4078.74,112.82 4109.74,81.82 4932.91,81.82 U1.5 4932.93,12.82 5041.93,12.82 5066.93,37.82 ; U1.3@5066.93,527.87 5066.93,122.16 5066.93,37.82 ; C1.2 5551.26,189.19 C2.1 5354.33,12.82 5304.33,-37.18 5150.33,-37.18 5066.93,37.82 ; CN1.4 CN1.3
ICP_CLK: P2.4 U3.18
ICP_DA: P2.3 U3.8
LAT_I: U2.1 U3.10 | length 58.1
  Top Layer w20: v1(2180.44,153.97) U2.1
LAT_O: IC1.12 U3.13 | length 58.1
  Top Layer w20: v1(421.3,-59.32) IC1.12
NetD1_2: D1.2 Q1.2 Q2.2 Q3.2 Q4.2 Q5.2 Q6.2 Q7.2 Q8.2 Q9.3 | length 10102.6
  Top Layer w20: v1(303.19,9518.82) 272.19,9487.82 272.19,9448.82 Q9.3 314.19,9448.82 379.15,9383.86 D1.2
  Bottom Layer w20: v1(303.19,9518.82) 629.92,9518.82 Q1.2 629.92,9378.82 1889.76,9378.82 ; Q2.2 1889.76,9378.82 ; Q4.2 4409.45,9387.82 ; Q5.2 5669.29,9387.82 ; Q6.2 6929.13,9378.82 ; Q7.2 8188.98,9378.82 ; Q8.2 9448.82,9378.82 8188.98,9378.82 ; 1889.76,9378.82 3149.61,9378.82 3153.9,9383.11 ; 3153.9,9383.11 3175.19,9361.82 4383.45,9361.82 4409.45,9387.82 ; 3153.9,9383.11 3149.61,9387.4 Q3.2 3153.9,9383.11 ; 4409.45,9387.82 4439.45,9357.82 5639.29,9357.82 5669.29,9387.82 ; 5669.29,9387.82 5678.29,9378.82 6929.13,9378.82 ; 6929.13,9378.82 8188.98,9378.82
NetD3_2: D3.2 L1.1 U1.2 | length 1391.3
  Top Layer w20: v1(4768.94,398.82) v1(5133.94,33.82)
  Bottom Layer w20: D3.2 4171.26,258.09 L1.1 4326.46,258.09 4467.19,398.82 v1(4768.94,398.82) ; v1(5133.94,33.82) U1.2
NetD4_2: D4.2 Q12.2 Q13.2 Q14.2 Q15.2 Q16.2 Q17.2 Q18.2 Q19.2 Q20.3 | length 9781.8
  Top Layer w20: Q20.3 310.19,8188.98 383.02,8116.14 D4.2 v1(459.19,8116.14)
  Bottom Layer w20: v1(459.19,8116.14) 624.51,8116.14 628.55,8120.18 ; Q12.2 629.92,8121.55 628.55,8120.18 ; Q13.2 1889.76,8118.82 ; Q14.2 3149.61,8118.82 ; Q15.2 Q15.2@4409.45,8166.08 ; Q16.2 5669.29,8137.82 ; Q17.2 6929.13,8137.82 ; Q18.2 8188.98,8137.82 ; Q19.2 9448.82,8137.82 9423.82,8112.82 8213.98,8112.82 8188.98,8137.82 ; 628.55,8120.18 629.92,8118.82 1889.76,8118.82 ; 1889.76,8118.82 3149.61,8118.82 ; 3149.61,8118.82 4362.19,8118.82 Q15.2@4409.45,8166.08 ; Q15.2@4409.45,8166.08 4409.45,8137.66 4450.19,8096.92 5628.39,8096.92 5669.29,8137.82 ; 5669.29,8137.82 5696.4,8110.71 6902.03,8110.71 6929.13,8137.82 ; 6929.13,8137.82 6929.13,8118.82 8188.98,8118.82 8188.98,8137.82
NetD5_2: D5.2 Q21.2 Q22.2 Q23.2 Q24.2 Q25.2 Q26.2 Q27.2 Q28.2 Q29.3 | length 9983.4
  Top Layer w20: Q29.3 314.19,6929.13 379.15,6864.17 D5.2 394.13,6887.76 v1(418.19,6911.82)
  Bottom Layer w20: v1(418.19,6911.82) 418.19,6886.82 475.19,6829.82 600.19,6829.82 629.92,6859.55 ; Q21.2 629.92,6859.55 ; Q22.2 1889.76,6858.82 ; Q23.2 3149.61,6858.82 ; Q25.2 5669.29,6862.82 ; Q26.2 6929.13,6858.82 ; Q27.2 8188.98,6858.82 ; Q28.2 9448.82,6862.82 9398.82,6812.82 8213.98,6812.82 8188.98,6837.82 8188.98,6858.82 ; 629.92,6859.55 629.92,6858.82 1889.76,6858.82 ; 1889.76,6858.82 3149.61,6858.82 ; 3149.61,6858.82 4409.45,6858.82 4417.32,6866.69 ; 4417.32,6866.69 4471.19,6812.82 5619.29,6812.82 5669.29,6862.82 ; 4417.32,6866.69 4409.45,6874.56 Q24.2 4417.32,6866.69 ; 5669.29,6862.82 5673.29,6858.82 6929.13,6858.82 ; 6929.13,6858.82 8188.98,6858.82
NetD6_2: D6.2 Q30.2 Q31.2 Q32.2 Q33.2 Q34.2 Q35.2 Q36.2 Q37.2 Q38.3 | length 10446
  Top Layer w20: Q38.3 314.19,5669.29 D6.2@379.15,5604.33 ; v1(337.19,5588.82) D6.2@379.15,5604.33 ; D6.2 D6.2@379.15,5604.33
  Bottom Layer w20: v1(337.19,5588.82) 352.19,5603.82 352.19,5666.82 425.19,5739.82 889.66,5739.82 890.19,5739.29 ; Q30.2 629.92,5739.29 890.19,5739.29 ; Q31.2 1889.76,5598.82 ; Q32.2 3149.61,5602.4 ; Q33.2 4409.45,5611.08 ; Q34.2 5669.29,5612.82 ; Q35.2 6929.13,5598.82 ; Q36.2 8188.98,5612.82 ; Q37.2 9448.82,5612.82 9415.08,5579.08 8222.72,5579.08 8188.98,5612.82 ; 890.19,5739.29 1030.66,5598.82 1889.76,5598.82 ; 1889.76,5598.82 3149.61,5598.82 3149.61,5602.4 ; 3149.61,5602.4 3225.19,5526.82 4325.19,5526.82 4409.45,5611.08 ; 4409.45,5611.08 4525.19,5475.92 5532.39,5475.92 5669.29,5612.82 ; 5669.29,5612.82 5669.29,5598.82 6929.13,5598.82 ; 6929.13,5598.82 8188.98,5598.82 8188.98,5612.82
NetD7_2: D7.2 Q39.2 Q40.2 Q41.2 Q42.2 Q43.2 Q44.2 Q45.2 Q46.2 Q47.3 | length 9991.4
  Top Layer w20: v1(259.82,4409.45) Q47.3 314.19,4409.45 379.15,4344.49 D7.2
  Bottom Layer w20: v1(259.82,4409.45) 255.19,4404.82 325.19,4334.82 629.92,4334.82 Q39.2@629.92,4388.09 ; Q39.2 Q39.2@629.92,4388.09 ; Q40.2 1889.76,4338.82 ; Q41.2 3149.61,4338.82 ; Q42.2 4409.45,4338.82 ; Q43.2 5669.29,4338.82 ; Q44.2 Q44.2@6929.13,4361.82 ; Q45.2 8188.98,4338.82 ; Q46.2 9448.82,4337.82 8188.98,4338.82 ; Q39.2@629.92,4388.09 679.19,4338.82 1889.76,4338.82 ; 1889.76,4338.82 3149.61,4338.82 ; 3149.61,4338.82 4409.45,4338.82 ; 4409.45,4338.82 5669.29,4338.82 ; 5669.29,4338.82 6929.13,4337.82 Q44.2@6929.13,4361.82 ; Q44.2@6929.13,4361.82 6975.19,4361.82 6998.19,4338.82 8188.98,4338.82
NetD8_2: D8.2 Q48.2 Q49.2 Q50.2 Q51.2 Q52.2 Q53.2 Q54.2 Q55.2 Q56.3 | length 9823.5
  Top Layer w20: Q56.3 314.19,3149.61 379.15,3084.64 D8.2 v1(483.36,3084.64)
  Bottom Layer w20: v1(483.36,3084.64) 522.19,3045.82 609.19,3132.82 Q48.2@629.92,3132.82 ; Q48.2 Q48.2@629.92,3132.82 ; Q49.2 1889.76,3078.82 ; Q50.2 3149.61,3078.82 ; Q51.2 4409.45,3087.82 ; Q52.2 5669.29,3087.82 ; Q53.2 6929.13,3098.82 ; Q54.2 8188.98,3078.82 ; Q55.2 9448.82,3078.82 8188.98,3078.82 ; Q48.2@629.92,3132.82 629.92,3078.82 1889.76,3078.82 ; 1889.76,3078.82 3149.61,3078.82 ; 3149.61,3078.82 4409.45,3078.82 4409.45,3087.82 ; 4409.45,3087.82 4434.45,3062.82 5644.29,3062.82 5669.29,3087.82 ; 5669.29,3087.82 5669.29,3078.82 6929.13,3078.82 6929.13,3098.82 ; 6929.13,3098.82 6975.19,3098.82 6995.19,3078.82 8188.98,3078.82
NetD9_2: D9.2 Q57.2 Q58.2 Q59.2 Q60.2 Q61.2 Q62.2 Q63.2 Q64.2 Q65.3 | length 10034.9
  Top Layer w20: Q65.3 314.19,1889.76 379.15,1824.8 D9.2 v1(394.13,1708.82)
  Bottom Layer w20: v1(394.13,1708.82) 525.92,1708.82 629.92,1812.82 Q57.2@629.92,1869.09 ; Q57.2 Q57.2@629.92,1869.09 ; Q58.2 1889.76,1818.82 ; Q59.2 3149.61,1818.82 ; Q60.2 4409.45,1835.34 ; Q61.2 5669.29,1835.82 ; Q62.2 Q62.2@6929.13,1842.82 ; Q63.2 8188.98,1818.82 ; Q64.2 9448.82,1837.82 9423.82,1812.82 8194.98,1812.82 8188.98,1818.82 ; Q57.2@629.92,1869.09 680.19,1818.82 1889.76,1818.82 ; 1889.76,1818.82 3149.61,1818.82 ; 3149.61,1818.82 3167.35,1801.08 4375.19,1801.08 4409.45,1835.34 ; 4409.45,1835.34 4409.45,1818.82 5669.29,1818.82 5669.29,1835.82 ; 5669.29,1835.82 5784.34,1720.76 6825.19,1720.76 Q62.2@6929.13,1842.82 ; Q62.2@6929.13,1842.82 6975.19,1842.82 6999.19,1818.82 8188.98,1818.82
NetD10_2: D10.2 Q66.2 Q67.2 Q68.2 Q69.2 Q70.2 Q71.2 Q72.2 Q73.2 Q74.3 | length 10054
  Top Layer w20: Q74.3 314.19,708.66 379.15,643.7 D10.2 449.19,643.7 455.07,637.82 629.92,637.82 Q66.2
  Bottom Layer w20: Q66.2 629.92,687.82 707.92,609.82 735.19,609.82 925.19,799.82 1834.19,799.82 1853.19,780.82 1889.76,780.82 Q67.2 1889.76,660.82 1936.19,660.82 1959.19,637.82 3149.61,637.82 ; Q68.2 3149.61,637.82 ; Q69.2 4409.45,637.82 ; Q70.2 5669.29,637.82 ; Q71.2 Q71.2@6929.13,685.87 ; Q72.2 8188.98,637.82 ; Q73.2 9448.82,637.82 8188.98,637.82 ; 3149.61,637.82 4409.45,637.82 ; 4409.45,637.82 4693.16,629.82 4806.17,742.83 5370.17,742.83 5475.19,637.82 5669.29,637.82 ; 5669.29,637.82 6929.13,637.82 Q71.2@6929.13,685.87 ; Q71.2@6929.13,685.87 6977.19,637.82 8188.98,637.82
NetIC1_1: IC1.1 R11.2 | length 135.2
  Top Layer w20: IC1.1 650.19,219.3 681.34,250.46 R11.2
NetIC1_2: IC1.2 R12.2 | length 104.7
  Top Layer w20: IC1.2 571.3,253.82 595.91,278.43 R12.2
NetIC1_3: IC1.3 R13.2 | length 100.1
  Top Layer w20: R13.2 507.72,272.4 521.3,258.82 IC1.3
NetIC1_4: IC1.4 R15.2 | length 119.3
  Top Layer w20: R15.2 425.33,313.79 471.3,267.82 IC1.4
NetIC1_5: IC1.5 R16.2 | length 818.2
  Top Layer w20: v1(287.19,481.82) 287.19,313.79 R16.2 ; v1(421.19,160.82) 421.3,160.93 IC1.5
  Bottom Layer w20: v1(287.19,481.82) 446.19,481.82 515.19,412.82 515.19,254.82 v1(421.19,160.82)
NetIC1_6: IC1.6 R17.2 | length 58.1
  Top Layer w20: IC1.6 v1(371.3,277.45)
NetIC1_7: IC1.7 R18.2 | length 356.5
  Top Layer w20: v1(151.02,203.82) R18.2 ; v1(321.19,160.82) 321.3,160.93 IC1.7
  Bottom Layer w20: v1(151.02,203.82) 278.19,203.82 v1(321.19,160.82)
NetIC1_15: IC1.15 R10.2 | length 594.6
  Top Layer w20: v1(571.19,56.82) 571.3,56.71 IC1.15 ; R10.2 v1(814.19,313.79)
  Bottom Layer w20: v1(571.19,56.82) 619.19,8.82 677.19,8.82 814.19,145.82 v1(814.19,313.79)
NetL_PW1_1: L_PW1.1 R4.2 | length 86.7
  Top Layer w20: L_PW1.1 5991.81,211.82 5992.13,212.14 R4.2
NetR23_1: R23.1 U2.11 | length 1774.6
  Top Layer w20: R23.1 v1(946.98,763.03) ; U2.11 v1(1930.44,90.04)
  Bottom Layer w20: v1(946.98,763.03) 1635.98,763.03 1975.19,423.82 1975.19,242.6 1950.19,217.6 1916.66,217.6 1916.66,103.82 v1(1930.44,90.04)
NetR24_1: R24.1 U2.12 | length 961.9
  Top Layer w20: U2.12 1980.44,83.82 1998.44,101.82 2197.19,101.82 2215.19,119.82 2215.19,336.3 2082.67,468.82 R24.1
NetR25_1: R25.1 U2.13 | length 2056.6
  Top Layer w20: v1(2030.19,49.82) 2030.44,49.56 U2.13 ; v1(2215.19,27.82) 2291.19,-48.18 3203.19,-48.18 3346.45,95.08 R25.1
  Bottom Layer w20: v1(2030.19,49.82) 2052.19,27.82 v1(2215.19,27.82)
NetR26_1: R26.1 U2.14 | length 3476
  Top Layer w20: v1(2080.19,-116.18) 2080.44,-115.93 U2.14 ; v1(2433.19,-200.18) 4493.3,-200.18 4606.3,-87.18 R26.1
  Bottom Layer w20: v1(2080.19,-116.18) 2349.19,-116.18 v1(2433.19,-200.18)
NetR27_1: R27.1 U2.3 | length 4614.9
  Top Layer w20: v1(2080.19,153.82) 2080.44,154.07 U2.3 ; v1(5450.19,-120.18) 5450.19,312.82 5775.19,637.82 5866.14,637.82 R27.1
  Bottom Layer w20: v1(2080.19,153.82) 2126.19,199.82 2390.19,199.82 2734.19,-144.18 5426.19,-144.18 v1(5450.19,-120.18)
NetR28_1: R28.1 U2.4 | length 5498.6
  Top Layer w20: U2.4 v1(2030.44,360.82) ; v1(7075.19,589.82) 7125.98,640.61 R28.1
  Bottom Layer w20: v1(2030.44,360.82) 2185.44,515.82 4640.07,515.82 4837.08,712.83 5306.17,712.83 5429.19,589.82 v1(7075.19,589.82)
NetR29_1: R29.1 U2.5 | length 7268.2
  Top Layer w20: v1(1980.44,153.82) U2.5 ; v1(8047.19,-189.18) 8381.89,145.52 R29.1
  Bottom Layer w20: v1(1980.44,153.82) 2019.44,114.82 2386.19,114.82 2690.19,-189.18 v1(8047.19,-189.18)
NetR30_1: R30.1 U2.6 | length 8884.8
  Top Layer w20: v1(1930.19,269.82) 1930.44,269.56 U2.6 ; v1(9649.6,154.23) R30.1
  Bottom Layer w20: v1(1930.19,269.82) 1907.97,247.6 1886.66,247.6 1886.66,15.82 2136.66,-234.18 9261.19,-234.18 v1(9649.6,154.23)
RST: P2.5 R22.2 U3.4 | length 169.5
  Top Layer w20: R22.2 1340.68,-108.45 P2.5
RX3.3V: P1.2 Q11.2 R6.1
RX5V: Q11.3 R3.1 U3.3 | length 60.9
  Top Layer w20: v1(7093.94,-1099.18) 7151.1,-1099.18 R3.1
T1: Q9.1 R1.1 R10.1 | length 10192.9
  Top Layer w20: R1.1 175.19,9488.18 Q9.1 220.9,9507.23 297.13,9583.46 828.54,9583.46 999.19,9412.82 999.19,2650.54 1040.76,2608.97 1040.76,579.1 854.19,392.53 R10.1
T2: Q20.1 R7.1 R11.1 | length 11582.3
  Top Layer w20: R7.1 173.19,8232.28 177.12,8228.35 Q20.1 275.19,8228.35 455.19,8408.35 455.19,9437.82 432.19,9460.82 364.19,9460.82 340.67,9484.34 340.67,9553.46 813.54,9553.46 890.19,9476.82 890.19,2701.82 969.97,2622.04 969.97,2551.82 968.19,2550.04 968.19,869.38 1010.76,826.81 1010.76,600.39 844.19,433.82 681.34,433.82 R11.1
T3: Q29.1 R8.1 R12.1 | length 6994.2
  Top Layer w20: v1(36.19,4487.82) 57.19,4508.82 57.19,6925.5 100.19,6968.5 R8.1 175.19,6968.5 Q29.1 ; R12.1 v1(595.91,435.82)
  Bottom Layer w20: v1(36.19,4487.82) 36.19,1500.82 494.19,1042.82 494.19,855.93 446.92,808.66 446.92,584.81 v1(595.91,435.82)
T4: Q38.1 R9.1 R13.1 | length 6240.6
  Top Layer w20: R9.1 175.19,5708.66 Q38.1 329.5,5708.66 v1(386.35,5651.82) ; R13.1 507.72,433.35 v1(590.19,515.82) ; v1(834.19,1036.66) v1(834.19,5596.82)
  Bottom Layer w20: v1(386.35,5651.82) 441.35,5596.82 v1(834.19,5596.82) ; v1(590.19,515.82) 476.92,629.09 476.92,778.66 576.19,778.66 v1(834.19,1036.66)
T5: Q47.1 R14.1 R15.1 | length 4581
  Top Layer w20: v1(87.19,429.82) 87.19,2885.82 57.19,2915.82 57.19,4412.82 93.18,4448.81 R14.1 175.19,4448.81 Q47.1 ; R15.1 v1(419.53,429.82)
  Bottom Layer w20: v1(87.19,429.82) 132.19,384.82 374.53,384.82 v1(419.53,429.82)
T6: Q56.1 R16.1 R19.1 | length 3763.8
  Top Layer w20: R19.1 175.19,3188.97 Q56.1 333.03,3188.98 v1(333.19,3188.82) ; R16.1 331.34,412.82 496.34,577.82 856.19,577.82 980.76,702.39 980.76,796.81 936.19,841.38 v1(936.19,2585.82)
  Bottom Layer w20: v1(333.19,3188.82) 442.4,3079.61 442.4,3049.61 472.4,3049.61 v1(936.19,2585.82)
T7: Q65.1 R17.1 R20.1 | length 1917.2
  Top Layer w20: R20.1 175.19,1929.13 Q65.1 341.19,1929.13 341.19,1914.82 377.19,1878.82 425.19,1878.82 460.19,1843.82 v1(460.19,934.82) ; v1(238.19,439.82) 241.58,436.43 R17.1
  Bottom Layer w20: v1(238.19,439.82) 238.19,712.82 v1(460.19,934.82)
T8: Q74.1 R18.1 R21.1 | length 89.5
  Top Layer w20: R21.1 175.19,748.03 Q74.1
TX3.3V: P1.3 Q10.2 R5.1
TX5V: Q10.3 R2.1 U3.2 | length 222.9
  Top Layer w20: 6840.94,-1277.18 6958.19,-1159.93 R2.1
pads on no net: IC1.9 P2.2 Q18.3 Q21.3 Q27.3 Q36.3 Q45.3 Q54.3 Q63.3 Q72.3 U2.7 U3.1 U3.5 U3.6 U3.16 U3.17 U3.19 U3.20

## Keep-outs
Keep-Out Layer:
  the board outline again, w5.91